# Altium PCB vp40_base_board.PcbDoc (part 2 of 5)
Units mil, origin at the board's own origin, x right, y up, seen from the top; angles counter-clockwise.
Board outline 8267.72 x 4330.71 mil, 4 copper layers (Top Layer, Internal Plane 1, Internal Plane 2, Bottom Layer), stack 30.635 mil thick; 531 components, 391 nets, 1969 pads, 1352 vias.
Unrouted connection lines stored in the file: 302.
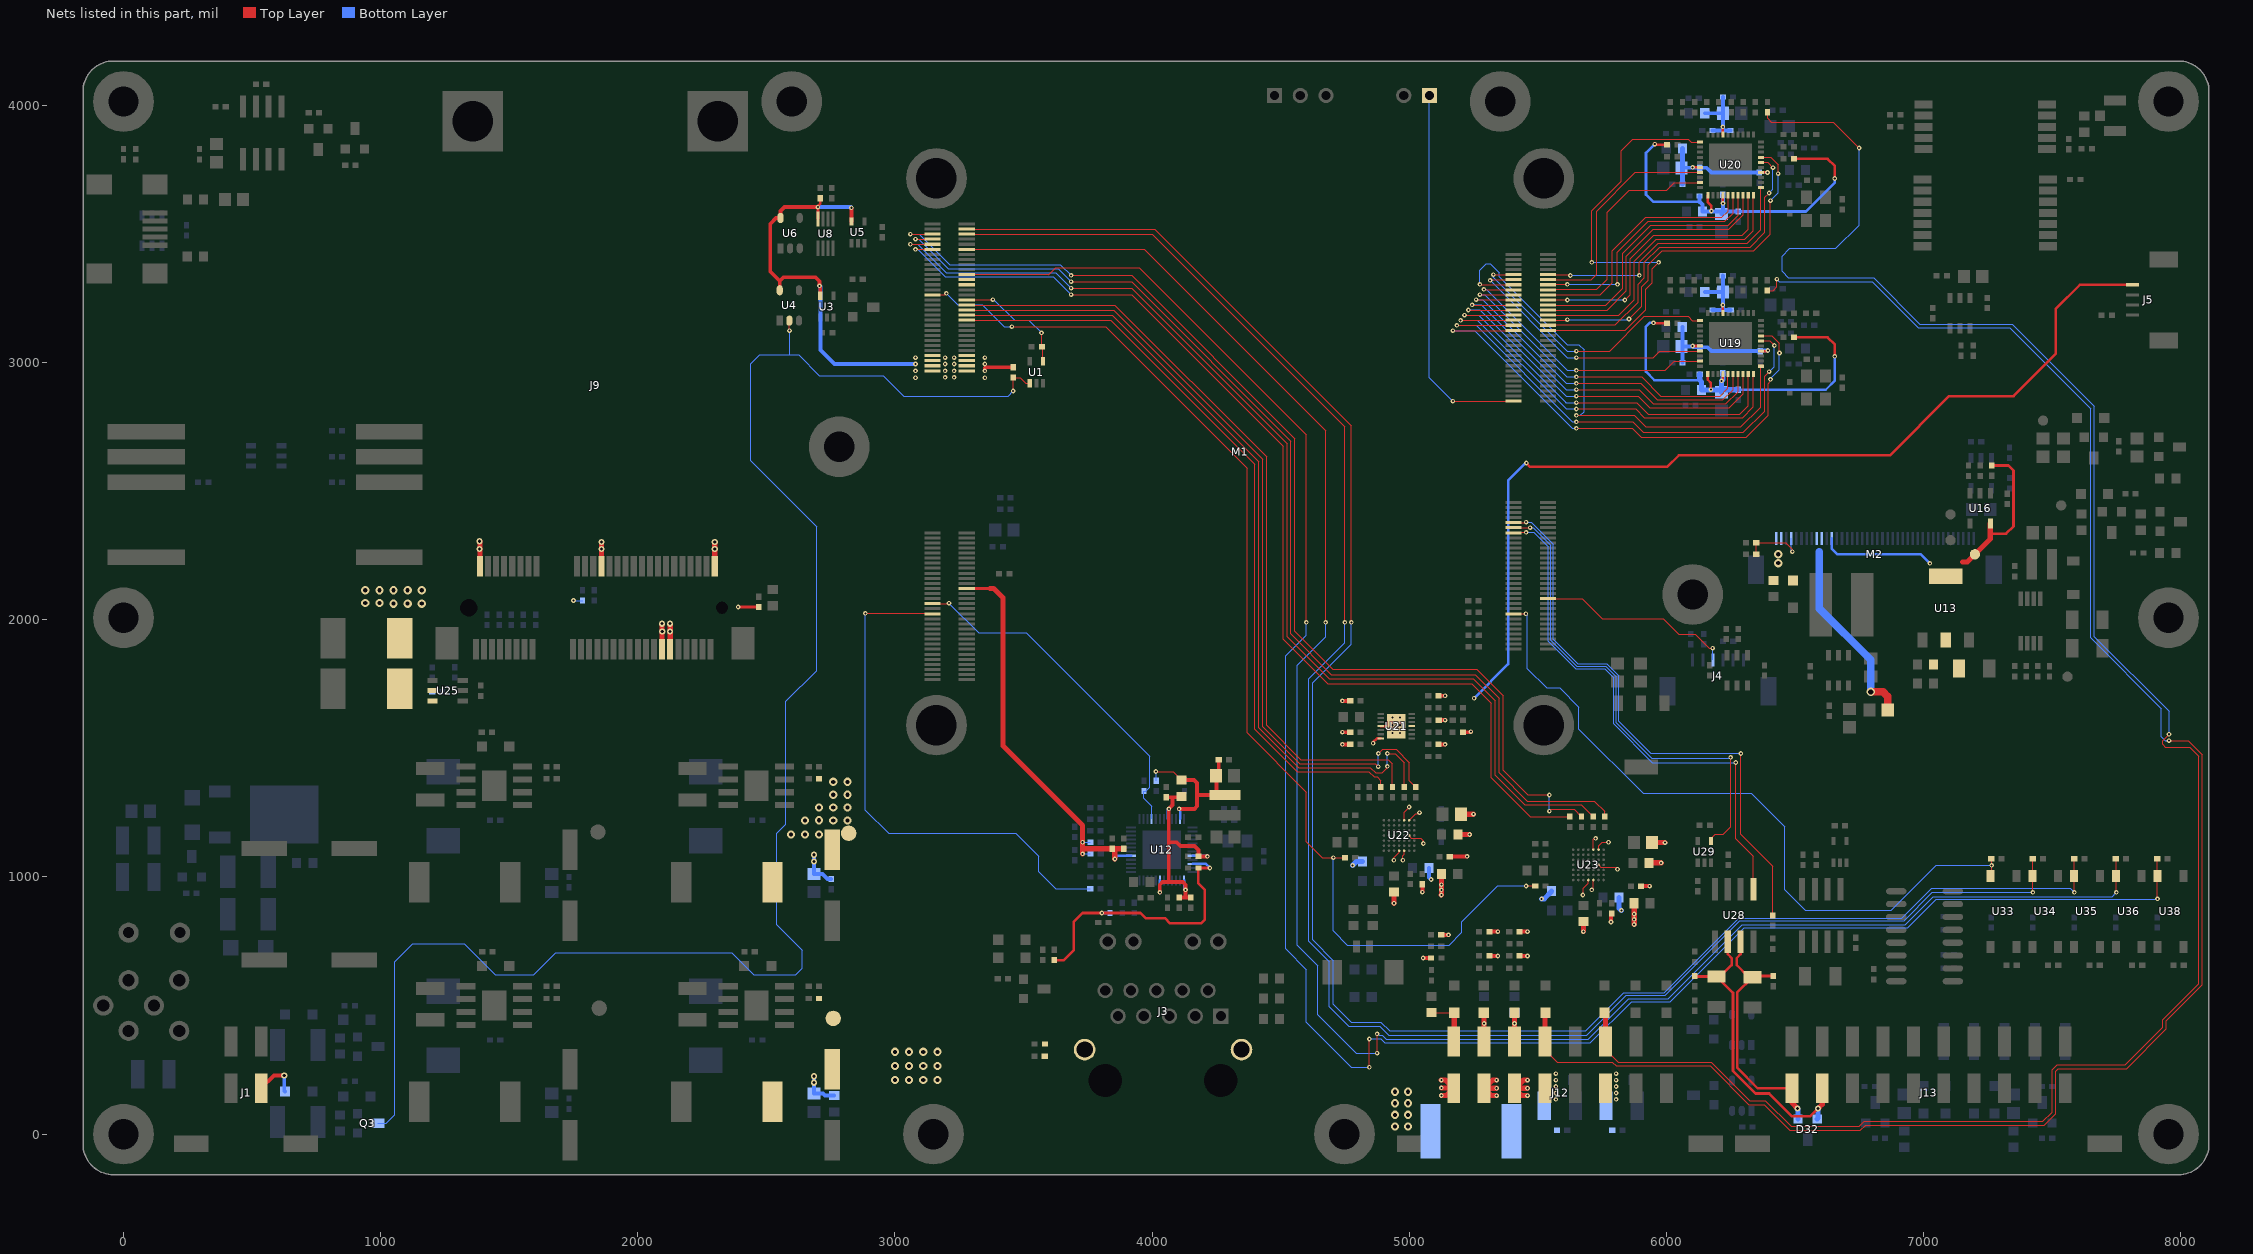
[diagram p4: the nets of this part, all layers, seen from the top]

## Part data
C1 C2 C3 C4 C6 C8 C9 C10 C11 C13 C14 C15 C16 C18 C19 C20 C21 C22 C23 C24 C26 C28 C29 C30 C31 C33 C34 C35 C36 C37 C38 C39 C40 C41 C42 C43 C44 C45 C46 C47 C48 C49 C50 C51 C52 C53 C54 C55 C56 C57 C58 C60 C73 C75 C76 C77 C78 C79 C80 C81 C82 C83 C84 C85 C86 C87 C88 C89 C90 C91 C92 C93 C94 C95 C96 C97 C98 C99 C100 C101 C102 C103 C104 C105 C106 C107 C108 C109 C110 C111 C112 C113 C114 C115 C116 C117 C118 C119 C120 C121 C122 C123 C124 C125 C126 C127 C128 C129 C130 C131 C132 C133 C134 C135 C136 C137 C138 C139 C140 C141 C142 C143 C144 C145 C146 C147 C148 C149 C150 C151 C152 C153 C154 C155 C156 C157 C158 C159 C160 C161 C162 C163 C164 C165 C166 C167 C168 C169 C202 C203 C204 C205 C206 C207 C208 C209 C210 C211 C213 C214 C216: library part Cap, "Capacitor"
C5 C7 C12 C17 C25 C27 C181 C182: library part "CAP WP"
C32 C170 C171 C172 C173 C174: library part CAP_Dup1
C59 C64 C65 C67 C69 C74: library part GRM155R71C104KA88D, "CAP, CERM, 0.1 μF, 16 V, +/- 10%, X7R, 0402"
C61 C62: library part C2012X5R1E106K125AB, "CAP, CERM, 10 μF, 25 V, +/- 10%, X5R, 0805"
C63 C71: library part GRM219R61A106KE44D, "CAP, CERM, 10 μF, 10 V, +/- 10%, X5R, 0805"
C66: library part GRM155R71H332KA01D, "CAP, CERM, 3300 pF, 50 V, +/- 10%, X7R, 0402"
C68 C72: library part GRM188R61H105KAALD, "CAP, CERM, 1 μF, 50 V, +/- 10%, X5R, 0603"
C70 C175 C176 C177 C178 C179 C180 C183 C184 C185 C186 C187 C188 C189 C190 C191 C192 C193 C199 C200 C201: library part "P_CAP NP"
C194 C195 C196 C197 C198: library part CAP
D1 D5 D6 D7 D8 D9 D10 D11 D12 D13 D14 D20 D35 D39 D42 D44 D46 D47 D48: library part "Diode 11DQ03", "Schottky Rectifier"
D2 D3 D4 D34 D37 D41: library part MMGZ5231BPTLL34
D15 D16: "Diode, Schottky, 30 V, 0.2 A, SOT-23"
D17: "Diode, Zener, 7.5 V, 200 mW, SOD-323F"
D18: library part MM3Z18VB, "Diode, Zener, 18 V, 200 mW, SOD-323F"
D19: "Diode, Schottky, 20 V, 1 A, SOD-123FL"
D21 D22 D24 D25 D26 D27 D28 D36 D38 D40 D43 D45: library part PESD
D31: library part LN01401_1
D32: library part PESD2CAN
F1: library part 2A_32VDC_0467-002
J1 J5: library part "Header 4", "Header, 4-Pin"
J2 J6: library part "Header 2", "Header, 2-Pin"
J4: library part "Header 6", "Header, 6-Pin"
J7: library part FOX_UH51543-JS7
J10: library part HRS_U_0.FL-R-SMT-10
J11: library part "Header 3", "Header, 3-Pin"
J12: "Header, 8-Pin, Dual row"
J13: "Header, 10-Pin, Dual row"
L1: library part BNX002-01
L2 L3 L4 L5: library part 4.7UH_CDH2D09BNP-4R7MC_0.7A_20%
L6 L8 L11 L12 L13 L14 L15 L16 L17 L18 L19 L20 L21 L22 L23 L24 L25 L26 L27 L28 L29 L30: library part Inductor, "Inductor"
L7 L9 L10: library part INDUCTOR, "IND PWR 4.7UH@1MHZ 1A 20% SMD"
L31: library part 2.2UH_LPS3015-222MLC_1.5A_20%~D
M2: library part LVDS-LCD7
Q1 Q8: library part AO3401L_SOT23-3_0
Q2 Q6: library part PNP, "PNP Bipolar Transistor"
Q3 Q5 Q10 Q11 Q12: library part MMBT3904_NL_SOT23-3
Q4 Q9 Q13 Q14: library part MOSFET-N, "N-Channel MOSFET"
Q7: library part NPN, "NPN Bipolar Transistor"
R1 R2 R3: library part RES1
R4 R5 R11 R23 R24 R25 R26 R27 R28 R29 R30 R31 R32 R33 R34 R35 R36 R37 R38 R39 R40 R41 R42 R43 R45 R46 R47 R48 R49 R50 R51 R52 R53 R54 R55 R56 R57 R77 R78 R79 R80 R81 R82 R83 R84 R85 R86 R87 R88 R89 R90 R91 R92 R93 R94 R95 R96 R97 R98 R99 R100 R101 R102 R103 R104 R105 R106 R107 R108 R109 R110 R111 R112 R113 R114 R115 R116 R117 R118 R119 R120 R121 R122 R123 R124 R125 R131 R132 R133 R149 R150 R151 R154 R155 R156 R159 R160 R161 R164 R165 R167 R168: library part CR16-1003FM
R6 R9 R147 R148 R152 R153 R157 R158 R162 R163 R166 R169: library part R
R7 R8 R10 R12 R13 R14 R15 R16 R17 R18 R19 R20 R21 R22: library part Res3, "Resistor"
R58 R59 R60 R61 R62 R63 R64 R65 R66 R67 R68 R69 R70 R71 R72 R73 R74 R75 R76 R126 R127 R128 R129 R130 R134 R135 R136 R137 R138 R139 R140 R141 R142 R143 R144 R145 R146: library part P_R
U2 U7 U9 U10: library part LM22670_0
U4 U6 U37 U39: library part 74LVC1G04GW_SOT353-5
U8: library part NC7SZ74-US8_0, "IC;NC7SZ74,D-TYPE FLIP-FLOP,US8"
U11 U13: library part LD1117AS18, "IC VREG LDO 1.8V 1A 10V SOT-223"
U12: library part AR8031_QFN48, "IC XCVR ETHERNET PHY 10/100/1000G-BIT 3.3V QFN48"
U14: library part TPS73633DBVT
U15: library part TPS61085DGKR, "18.5 V, 2 A, 650 KHz / 1.2 MHz Step-Up DC-DC Converter with Forced PWM Mode, 2.3 to 6 V, -40 to 85 degC, 8-pin SOP (DGK8), Green (RoHS & no Sb/Br)"
U16: "Single 30V High Output Current and Unlimited Capacitive Load Op Amp"
U17 U25 U26: library part TPS27081A
U21: library part MAX9814_TDFN14, "IC LIN AGC AMP 2.7-5.5V TDFN14"
U22 U23: library part WM8962_BGA_49P_CUST, "IC AUDIO CODEC 24BIT DAC 2 CH ADC 1.8V BGA49"
U24: library part MIC2526_8P, "IC LIN SW PWR ACTIVE HIGH DUAL 2.7V-5.5V 0.5A SOIC8"
U27: library part NEO-5M
U28: library part TJA1040T_SO_8P, "IC XCVR CAN HS 5V SO8"
U30: library part MAX3232
U32: library part MAX485
U33 U34 U35 U36 U38: library part Optoisolator1, "4-Pin Phototransistor Optocoupler"
Y1: library part XTAL_13Y, "XTAL 25MHZ -- -- SMT"
Y2 Y3: library part CRYSTAL_JXS63, "XTAL 28.63636MHZ 10PF RSN -- SMT"

## Free pads (board coordinates)
  round 236.22 hole 118.11: MT1(0,0) MT2(3149.61,0) MT3(4748.03,0) MT4(7952.76,0) MT5(7952.76,2007.87) MT6(6102.36,2098.43) MT7(2783.46,2673.23) MT8(0,2007.87) MT9(0,4015.75) MT10(2598.43,4015.75) MT11(5354.33,4015.75) MT12(7952.76,4015.75)
  round 52 on Plane2: ""(1130,635) ""(1130,675) ""(1170,635) ""(1170,675) ""(1210,635) ""(1210,675) ""(1250,635) ""(1250,675) ""(1290,635) ""(1290,675) ""(1649.61,885.83) ""(1681.1,885.83) ""(1779.53,944.88) ""(1799.21,763.78) ""(1799.21,803.15) ""(1799.21,842.96) ""(1799.21,881.89) ""(1838.58,763.78) ""(1838.58,803.15) ""(1838.58,842.52) ""(1838.58,881.89)
  round 56 on Plane2: ""(1421.26,458.66) ""(1421.26,500) ""(1421.26,540) ""(1465,460) ""(1465,500) ""(1465,540)
  round 48 on Plane2: ""(1470,708.66) ""(1515,365) ""(1574.8,655) ""(1724.41,575)
  round 60 smd paste-30: ""(1845,1175) ""(1850,490) ""(2760,450) ""(2820,1170)
  round 40 on Plane2: ""(2440,1315) ""(2440,1355) ""(2440,1395)
  round 40 smd paste-30: ""(7105,2310) ""(7105,2410) ""(7200,2255) ""(7465,2775) ""(7535.43,2445) ""(7560,1779.13)

## Via types
v1: diameter 18, hole 8, Top Layer to Bottom Layer, tented both sides, 481 vias
v2: diameter 18, hole 8, Top Layer to Bottom Layer, 376 vias
v3: diameter 32, hole 16, Top Layer to Bottom Layer, tented both sides, 202 vias
v4: diameter 24, hole 12, Top Layer to Bottom Layer, tented both sides, 182 vias
v5: diameter 24, hole 12, Top Layer to Bottom Layer, 65 vias
v6: diameter 32, hole 16, Top Layer to Bottom Layer, 34 vias
v7: diameter 32, hole 20, Top Layer to Bottom Layer, 7 vias
v8: diameter 32, hole 20, Top Layer to Bottom Layer, tented both sides, 3 vias
v9: diameter 35, hole 20, Top Layer to Bottom Layer, 2 vias

## Nets (pads, with @x,y where several pads share a name; then routed paths per layer and width w, separated by ;. In a path a pad name is that pad's centre, name@x,y a point inside that pad or via, vN(x,y) a via of type N, cw(c..) or ccw(c..) an arc to the next point about the centre after c; other vN are vias at no path point)
2V5-RGMII: C35.1 R48.2 R49.2 U12.10 | length 1108.7
  Top Layer w10: R48.2@3620,676.98 3656.98,676.98 3695,715 3695,825 3730,860 v1(3805,860) 3955,860 3975,840 4050,840 4070,820 4190,820 4205,835 4205,950 4180.13,974.87 C35.1@4180.13,1035 v1(4225,1035)
  Bottom Layer w10: v1(3805,860) R49.2@3836.3,860 ; U12.10@4157.48,1051.18 4208.82,1051.18 v1(4225,1035)
3V3-VIDEO1: C76.1 C86.1 C101.2 C102.2 L14.2 R79.2 R81.2 U19.1 U19.4 | length 1549.2
  Top Layer w10: v1@5951.46,3153.54 R79.2@6002.87,3153.54 ; U19.1@6160.98,2956.69 6160.98,2933.7 6173.24,2921.43 v1(6173.24,2895) ; v1(6215,2929.13) 6220.03,2934.17 U19.4@6220.03,2956.69 ; R81.2@6495.81,3098.43 6626.78,3098.43 6655,3070.21 v2(6655,3025)
  Bottom Layer w10: v1(5950,3155) 5935,3155 5920,3140 5920,2965 5953,2932 6129.39,2932 ; C101.2@6280,2894.87 6619.87,2894.87 6655,2930 v2(6655,3025)
  Bottom Layer w15: 6129.39,2932 6129.87,2932.48
  Bottom Layer w20: C102.2@6129.87,2955 6129.87,2932.48 6137.35,2925 L14.2@6137.35,2893.7 C86.1@6206.3,2893.7 ; C86.1@6215,2885 v1(6215,2929.13) 6220.03,2934.17 C76.1@6220.03,2960.19 ; C86.1@6224.87,2894.87 C101.2@6280,2894.87
3V3-VIDEO2: C106.1 C107.1 C131.2 C132.2 L18.2 R88.2 R90.2 U20.1 U20.4 | length 1517.3
  Top Layer w10: v1@5956.84,3848.16 R88.2@6002.99,3848.16 ; U20.1@6161.1,3651.31 6161.1,3623.9 6175,3610 v1(6175,3590) ; U20.4@6220.16,3651.31 6220.16,3620.16 6220,3620 v1(6220.47,3620) ; R90.2@6495.94,3793.04 6627.17,3793.04 6655,3765.21 v2(6655,3716.54)
  Top Layer w15: v1(5955,3850) v1@5956.84,3848.16
  Bottom Layer w10: v1(5955,3850) 5921,3816 5921,3654 5949.8,3625.2 6128.14,3625.2 ; C132.2@6279.69,3588.08 6543.08,3588.08 6655,3700 v2(6655,3716.54)
  Bottom Layer w15: 6128.14,3625.2 6129.56,3626.62 ; C131.2@6129.56,3648.2 6129.56,3626.62 ; C107.1@6214.69,3578.2 6220.47,3583.99 C107.1@6220.47,3588.2 ; C106.1@6219.69,3653.08 6220.47,3652.29 v1(6220.47,3620) C107.1@6220.47,3588.2 ; C132.2@6279.69,3588.08 6279.56,3588.2 C107.1@6220.47,3588.2 ; 6129.56,3626.62 6141.18,3615 L18.2@6141.18,3588.2 C107.1@6220.47,3588.2
12V-CAM: C25.1 C26.2 C29.2 F1.1 L5.2 pad.@2760,450 R20.2 | length 149.5
  Bottom Layer w15: v4(2685,225) 2685.04,224.96 C26.2@2685.04,157.48 2720,157.48 2727.87,149.61 C29.2@2763.78,149.61
  other v3: 3000,210 3055,210 3110,210 3165,210 3000,265 3055,265 3110,265 3165,265 3000,320 3055,320 3110,320 3165,320
  other v4: 2685,200
  other v6: 4945,30 4995,30 4945,75 4995,75 4945,120 4995,120 4945,165 4995,165
ACC: Q3.1 R4.2 U1.1 U4.2 | length 6348.7
  Top Layer w4.7: U4.2@2589.38,3163.58 2589.38,3125.62 v2(2590,3125) ; v2(3460,2890) R4.2@3460,2942.44 3486.76,2942.44 3508.77,2920.43 U1.1@3524.25,2920.43
  Bottom Layer w4.7: Q3.1@989.45,41.94 1021.94,41.94 1055,75 1055,670 1125,740 1325,740 1445,620 1595,620 1680,705 2365,705 2450,620 2615,620 2640,645 2640,715 2540,815 2540,1170 2575,1205 2575,1682.58 2695,1802.58 2695,2362.91 2440,2617.91 2440,2995 2475,3030 2590,3030 ; v2(2590,3125) 2590,3030 ; v2(3460,2890) 3440,2870 3035,2870 2955,2950 2705,2950 2625,3030 2590,3030
ACC-INPUT: D4.1 J1.4 | length 174.5
  Top Layer w15: J1.4@535.43,178.35 585.43,228.35 v4(625,228.35)
  Bottom Layer w15: v4(625,228.35) 625,168.31 D4.1@627.95,165.35
ACC-STATUS: M1.D29 R5.2 U1.4 | length 451.5
  Top Layer w4.7: M1.D29@3279.53,3244.1 v2@3380.73,3244.1 ; v2(3570,3116.34) 3571.68,3114.65 R5.2@3571.68,3062.16 ; U1.4@3575.45,3005.43 3575.45,3058.05 R5.2@3575.62,3058.22
  Bottom Layer w4.7: v2(3380.73,3245) 3385,3245 3465,3165 3521.34,3165 v2(3570,3116.34)
AGND1: C135.1 C136.2 C138.2 C139.2 C140.1 C144.1 C146.1 C147.1 C152.1 C153.1 C154.1 J5.4 J12.2 L24.2 R99.2 R100.2 R101.2 R102.2 R103.2 U21.4 U21.7 U21.11 U21.15 U22.B1 U22.B4 U22.C1 U22.C7 U22.D7 | length 4974.9
  Top Layer w3: U22.B4@5000,1161.42 5000,1160 5008.77,1151.23 5045,1151.23
  Top Layer w4.7: v1(4940,1065) 4940,1075.33 4960.63,1095.96 U22.D7@4960.63,1102.36 ; v1(4975,1065) 4975,1082.68 4980.32,1088 U22.C7@4980.32,1102.36 ; 4980.3,1230.98 4980.3,1249.02 ; U22.C1@4980.32,1220.48 4980.32,1230.96 ; 4980.32,1249.04 4980.32,1252.25 v1(5000,1271.93) ; U22.B1@5000,1220.48 5024.83,1245.3 5035.3,1245.3 v1(5040,1250) ; 5045,1151.23 5055,1141.23 v1(5055,1130)
  Top Layer w10: v1(4860,1520) 4860,1524.38 4875,1539.38 U21.7@4889.76,1539.38 ; U21.4@4889.76,1586.62 U21.15@4949.8,1586.62 ; v2(5455.56,2610) 5470.56,2595 6003.19,2595 6048.19,2640 6870,2640 7100.08,2870.08 7350.09,2870.08 7515,3034.99 7515,3210 7608.15,3303.15 J5.4@7813.39,3303.15
  Top Layer w15: v1(4740,1562.99) C135.1@4770.77,1562.99 ; v1(4740,1685) 4740.04,1685.04 C139.2@4771.02,1685.04 ; v1(4740.04,1515.75) C138.2@4771.02,1515.75 ; v1(5051.18,940.94) C153.1@5051.18,972 ; v1(5053.89,685) R102.2@5085.13,685 ; R101.2@5114.36,1515.75 5139.51,1515.75 v1(5139.76,1516) ; R99.2@5114.36,1704.72 v1(5140,1704.72) ; C136.2@5114.8,1610.24 5139.76,1610.24 v1(5140,1610) ; R103.2@5124.87,775 v1(5152.93,775) ; C152.1@5157.93,1078.74 5159.19,1080 v1(5225,1080) ; R100.2@5208.85,1562.99 5237.99,1562.99 v1(5240,1565)
  Top Layer w20: v1(4940.74,897.83) 4940.94,898.03 C154.1@4940.94,940.94 ; v1(5124.87,210) 5141.57,210 J12.2@5171.57,180 ; v1(5124.87,930) 5125,930.13 v1(5125,950) v1(5125,970) 5125,1010.83 L24.2@5125.98,1011.81 ; v1(5125,150) 5144.88,150 J12.2@5173.23,178.35 J12.2@5171.57,180 ; v1(5125,180) J12.2@5171.57,180 ; C144.1@5188.99,1165.36 v1(5235,1165.36) ; C140.1@5200.8,1244.1 v1(5250,1244.09)
  Bottom Layer w10: v2(5252.52,1695) 5385,1827.48 5385,2542.36 5452.64,2610 v2(5455.56,2610)
  Bottom Layer w15: C147.1@5076.5,1035 5076.5,998.5 v1(5085,990)
  Bottom Layer w20: v1(4780,1045) 4795,1060 C146.1@4818.5,1060
  other v1: 4935,1560 4965,1560 4935,1590 4965,1590 4935,1620 4965,1620
AGND2: C155.1 C159.1 C163.1 C164.1 C167.1 C168.1 C169.1 J12.4 J12.6 L28.2 R111.2 R112.2 R113.2 R114.2 U23.B1 U23.B4 U23.C1 U23.C7 U23.D7 | length 1169.4
  Top Layer w3: U23.B4@5736.22,1047.24 5745.72,1037.74 5781.58,1037.74
  Top Layer w4.7: v1(5675,930) 5677.16,932.16 5677.16,944.7 5677.17,956.73 5696.85,976.41 U23.D7@5696.85,988.18 ; v1(5710,950) 5716.34,956.34 5716.34,987.98 U23.C7@5716.54,988.18 ; v1@5715,950 v1@5716.34,951.34 ; U23.C1@5716.54,1106.3 5716.54,1116.82 5716.34,1117.02 5716.34,1131.93 5716.54,1132.13 5716.54,1146.41 5720.13,1150 v1(5725,1150) ; U23.B1@5736.22,1106.3 5736.22,1121.22 5749.96,1134.96 5754.88,1134.96 5754.92,1135 v1(5775,1135) ; 5781.58,1037.74 5802.26,1037.74 v1(5810,1030) v1@5810,1025.48
  Top Layer w15: R111.2@5311.65,692.91 v1(5345,692.91) ; R113.2@5311.65,787.4 v1(5345,787.4) ; R114.2@5429.32,787.4 v1(5460,787.4) ; R112.2@5431.41,695 R112.2@5429.32,692.91 v1(5460,692.91) ; v1(5785,825) 5785,855.43 C168.1@5787.4,857.83 ; C167.1@5902.02,964.57 v1(5935,964.57)
  Top Layer w20: v1(5340,149.61) 5320.08,149.61 J12.4@5291.34,178.35 J12.4@5293.43,178.35 ; v1(5340,178.35) J12.4@5293.43,178.35 ; v1(5340,210) 5325.08,210 J12.4@5293.43,178.35 ; v1(5460,149.61) 5438.19,149.61 J12.6@5409.45,178.35 J12.6@5413.35,178.35 ; v1(5460,178.35) J12.6@5413.35,178.35 ; v1(5460,210) 5445,210 J12.6@5413.35,178.35 ; v1(5677.16,787.4) C169.1@5677.17,826.77 ; L28.2@5874.02,897.64 5875,896.65 v1(5875,815) ; C159.1@5933.07,1055.12 5979.88,1055.12 v1(5980,1055) ; C155.1@5944.88,1133.86 v1(5995,1133.86)
  Bottom Layer w20: v1(5515,915) 5525,915 5553.5,943.5 C163.1@5553.5,945 ; C164.1@5816.5,920 5816.5,878.5 v1(5825,870)
  other v1: 5875,835 5875,855.83
AUD3-RXD: M1.D27 R109.2 | length 3096.9
  Top Layer w4.7: M1.D27@3279.53,3224.41 3855.59,3224.41 4445,2635 4445,1590 4578.31,1456.69 4918.31,1456.69 4935,1440 R109.2@4935,1349.87
AUD3-TXC: M1.D21 R106.2 | length 2980.5
  Top Layer w4.7: M1.D21@3279.53,3165.36 3839.64,3165.36 4400,2605 4400,1575 4565,1410 4843.12,1410 4863.12,1390 4875,1390 4890,1375 R106.2@4890,1349.87
AUD3-TXD: M1.D23 R108.2 | length 3217
  Top Layer w4.7: M1.D23@3279.53,3185.04 3844.96,3185.04 4415,2615 4415,1580 4570,1425 4849.25,1425 4869.25,1405 4895,1405 4915,1425 v2(4915,1430) ; v2(4915,1480) 4945,1480 4980,1445 R108.2@4980,1349.87
  Bottom Layer w4.7: v2(4915,1430) v2(4915,1480)
AUD3-TXFS: M1.D25 R107.2 | length 3268.4
  Top Layer w4.7: M1.D25@3279.53,3204.73 3850.27,3204.73 4430,2625 4430,1585 4575,1440 4868.7,1440 v2(4879.57,1429.13) ; v2(4880,1480) 4896.35,1496.35 4948.65,1496.35 5000.17,1444.83 5000.17,1374.71 R107.2@5025,1349.87
  Bottom Layer w4.7: v2(4879.57,1429.13) 4879.57,1489.57 4880,1489.13 v2(4880,1480)
AUD4-RXD: M1.D56 R118.2 | length 4286.6
  Top Layer w4.7: v2(3060,3500) M1.D56@3145.67,3500 ; v2(3685,3340) 3920,3340 4555,2705 4555,1955 4702.91,1807.09 5262.91,1807.09 5365,1705 5365,1415 5461.1,1318.9 v2(5545,1318.9) ; v2(5545,1255.91) 5552.87,1263.78 5641.09,1263.78 R118.2@5670,1234.87
  Bottom Layer w4.7: v2(3060,3500) 3095,3500 3213.11,3381.89 3643.11,3381.89 v2(3685,3340) ; v2(5545,1255.91) v2(5545,1318.9)
AUD4-TXC: M1.D50 R115.2 | length 4133.7
  Top Layer w4.7: v2(3080,3440.95) M1.D50@3145.67,3440.95 ; v2(3685,3265) 3920,3265 4510,2675 4510,1925 4683.03,1751.97 5243.03,1751.97 5320,1675 5320,1385 5470.13,1234.87 R115.2@5625,1234.87
  Bottom Layer w4.7: v2(3080,3440.95) 3089.05,3440.95 3195,3335 3615,3335 v2(3685,3265)
AUD4-TXD: M1.D52 R117.2 | length 4271.8
  Top Layer w4.7: v2(3060,3460.63) M1.D52@3145.67,3460.63 ; v2(3685,3290) 3920,3290 4525,2685 4525,1935 4690,1770 5250,1770 5335,1685 5335,1395 5450,1280 5669.87,1280 R117.2@5715,1234.87
  Bottom Layer w4.7: v2(3060,3460.63) 3089.37,3460.63 3200,3350 3625,3350 v2(3685,3290)
AUD4-TXFS: M1.D54 R116.2 | length 4296.7
  Top Layer w4.7: v2(3080,3480.32) M1.D54@3145.67,3480.32 ; v2(3685,3315) 3920,3315 4540,2695 4540,1945 4697.6,1787.4 5257.6,1787.4 5350,1695 5350,1405 5460,1295 5719.91,1295 5760,1254.91 R116.2@5760,1234.87
  Bottom Layer w4.7: v2(3080,3480.32) 3080.32,3480 3092.76,3480 3207.76,3365 3635,3365 v2(3685,3315)
AUD-AUX-OUT1: D28.2 J12.3 L25.2 | length 154.6
  Top Layer w20: D28.2@5290,471.85 5291.34,470.51 v2(5291.34,430) J12.3@5291.34,360.24
  Bottom Layer w4.7: v2(5291.34,430) L25.2@5291.34,472.44
AUD-AUX-OUT2: D27.2 J12.5 L26.2 | length 154.3
  Top Layer w20: J12.5@5409.45,360.24 5409.45,471.3 D27.2@5410,471.85
  Bottom Layer w4.7: v2(5409.45,430) L26.2@5409.45,472.44
AUD-MCLK: M1.D32 R110.2 R119.2 | length 4444
  Top Layer w4.7: M1.D32@3145.67,3263.78 3193.51,3263.78 v2(3199.73,3270) ; v2(3455,3140) 3820,3140 4370,2590 4370,1560 4600,1330 4600,1137.43 4662.43,1075 v2(4705,1075) R110.2@4750.13,1075 ; v2(5455,965) R119.2@5490.13,965
  Bottom Layer w4.7: v2(3199.73,3270) 3244.73,3225 3339.87,3225 3424.87,3140 v2(3455,3140) ; v2(4705,1075) 4705,790 4760,735 5155,735 5205,785 5205,825 5345,965 v2(5455,965)
AUD-OUT: D24.2 J12.1 L20.2 | length 201
  Top Layer w4.7: L20.2@5086.61,472.44 5174.41,472.44 D24.2@5175,471.85
  Top Layer w20: J12.1@5173.23,360.24 5175,362.01 D24.2@5175,471.85
AVDD: C60.1 M2.29 pad.@7200,2255 R62.1 R67.1 U13.2 U13.4 U16.5 | length 1061.6
  Top Layer w10: 7259.84,2335 7321.14,2335 7350,2363.86 7350,2580 7329.87,2600.13 R67.1@7265,2600.13
  Top Layer w20: 7151.14,2225 7170,2225 7259.84,2314.84 7259.84,2335 U16.5@7259.84,2374.02
  Bottom Layer w10: M2.29@6643.7,2316.54 6643.7,2276.14 6664.84,2255 6990,2255 v1(7025,2220)
AVDD-1V8-VIDEO1: C82.1 C83.1 C96.2 C98.2 L13.2 U19.27 | length 306.4
  Top Layer w10: U19.27@6220.03,3192.91 v1(6220.03,3224.41)
  Bottom Layer w15: L13.2@6149.17,3275.59 C83.1@6220.03,3275.59 ; C98.2@6179.87,3205 6220,3205 C96.2@6250.13,3205 ; C82.1@6219.59,3338.58 6220.03,3338.14 C83.1@6220.03,3275.59 ; 6220.03,3205.03 v1(6220.03,3224.41) C83.1@6220.03,3275.59
AVDD-1V8-VIDEO2: C112.1 C113.1 C126.2 C128.2 L17.2 U20.27 | length 301.1
  Top Layer w10: v1(6220,3917.32) 6220.16,3917.17 U20.27@6220.16,3887.53
  Bottom Layer w15: L17.2@6149.29,3970.2 6219.84,3970.2 C113.1@6220,3970.05 ; C128.2@6179.56,3903.2 6220,3903.2 ; C112.1@6219.72,4033.2 6220.16,4032.76 C113.1@6220.16,3970.2 C113.1@6220,3970.05 ; C126.2@6249.81,3903.2 6220,3903.2 ; 6220,3903.2 v1(6220,3917.32) C113.1@6220,3970.05
BL-LED+: C72.1 D20.2 M2.39 M2.40
  other v3: 6435,2220.47 6435,2255
BL-LED-: M2.31 M2.32 R74.2 | length 753
  Top Layer w30: v8(6795,1720) 6842.52,1720 6860.87,1701.65 R74.2@6860.87,1650
  Bottom Layer w30: 6595,2265 6595,2044.09 6795,1844.09 v8(6795,1720)
BM-SEL: J2.1 M1.B2 | length 1462.3
  Top Layer w4.7: v2(5170,2850.39) M1.B2@5405.51,2850.39
  Bottom Layer w4.7: J2.1@5078.74,4039.37 5078.74,2941.65 v2(5170,2850.39)
BUTTON1: M1.A16 R150.2 U33.4 | length 2793.9
  Top Layer w4.7: M1.A16@5405.51,2023.62 v2(5453.94,2023.62) ; U33.4@7261.02,1003.94 7265,1007.91 v2(7265,1045) 7265,1069.45 R150.2@7263.59,1070.86
  Bottom Layer w4.7: v2(5453.94,2023.62) 5460,2017.56 5460,1810 5535,1735 5585,1735 5660,1660 5660,1575 5910,1325 6330,1325 6460,1195 6460,950 6540,870 6875,870 7050,1045 v2(7265,1045)
BUTTON2: M1.D55 R155.2 U34.4 | length 7269.2
  Top Layer w4.7: M1.D55@3279.53,3500 4000.63,3500 4750,2750.63 v2(4750,1990) ; R155.2@7425.01,1070.87 7425.2,1070.68 v2(7425.2,940)
  Bottom Layer w4.7: v2(4750,1990) 4750,1910 4610,1770 4610,750 4690,670 4690,495 4765,420 4885,420 4920,385 5690,385 5845,540 5995,540 6285,830 6925,830 7035,940 v2(7425.2,940)
BUTTON3: M1.D57 R159.2 U35.4 | length 7449.9
  Top Layer w4.7: M1.D57@3279.53,3519.69 4010.31,3519.69 4775,2755 v2(4775,1990) ; R159.2@7586.43,1070.87 7585.83,1070.27 U35.4@7585.83,1003.94 7586.61,1003.15 v2(7586.61,940)
  Bottom Layer w4.7: v2(4775,1990) 4775,1905 4625,1755 4625,755 4705,675 4705,505 4775,435 4890.12,435 4923.54,401.57 5686.57,401.57 5835,550 5990.98,550 6280.98,840 6915,840 7031.35,956.35 7570.26,956.35 v2(7586.61,940)
BUTTON4: M1.D49 R164.2 U36.4 | length 7659.9
  Top Layer w4.7: M1.D49@3279.53,3440.95 3969.05,3440.95 4675,2735 v2(4675,1990) ; v2(4875,315) v2(4875,390) ; R164.2@7747.84,1070.87 7750,1068.71 v2(7750,940)
  Bottom Layer w4.7: v2(4675,1990) 4675,1934.09 4565,1824.09 4565,735 4645,655 4645,465 4795,315 v2(4875,315) ; v2(4875,390) 4875,393.5 4883.5,385 4895,385 4910.12,369.88 5696.81,369.88 5853.74,526.81 6006.81,526.81 6295,815 6930,815 7038.65,923.65 7733.65,923.65 v2(7750,940)
BUTTON5: M1.D39 R167.2 U38.4 | length 7839.2
  Top Layer w4.7: M1.D39@3279.53,3342.52 3597.52,3342.52 3625,3370 3950,3370 4600,2720 v2(4600,1990) ; v2(4845,260) v2(4845,370) ; R167.2@7909.26,1070.87 7910,1070.13 v2(7910,915)
  Bottom Layer w4.7: v2(4600,1990) 4600,1940 4520,1860 4520,720 4600,640 4600,435 4775,260 v2(4845,260) ; v2(4845,370) 4890,370 4905,355 5705,355 5865,515 6014.56,515 6302.71,803.15 6938.15,803.15 7048.95,913.95 7908.95,913.95 v2(7910,915)
BUTTON6: M1.D37
BUTTON7: M1.D35
CABCEN0: M2.37 R72.2 R73.2 | length 258.6
  Top Layer w3.82: R72.2@6349.87,2255 R73.2@6349.87,2300 6465,2300 6490,2275 v1(6490,2265)
  Bottom Layer w3.82: M2.37@6486.22,2316.54 6486.22,2268.78 v1(6490,2265)
CAM1: D21.2 J12.7 R78.2 | length 7155.9
  Top Layer w4.7: J12.7@5527.56,360.24 5527.56,327.44 5574.8,280.2 5789.8,280.2 5805,265 6170,265 6320,115 6380,115 6480,15 6755,15 6775,35 7470,35 7515,80 7515,245 7525,255 7790,255 7945,410 7945,440 8085,580 8085,1475 8030,1530 v2(7955,1530) ; R78.2@6392.57,3280.8 6415.8,3280.8 6430,3295 v2(6430,3325)
  Top Layer w20: J12.7@5527.56,360.24 5527.56,469.41 D21.2@5530,471.85
  Bottom Layer w4.7: v2(6430,3325) 6440,3315 6800,3315 6980,3135 7335,3135 7650,2820 7650,1930 7925,1655 7925,1545 7940,1530 v2(7955,1530)
CAM1-PWR: C211.1 C213.1 C214.1 C216.1 D47.2 D48.2 F1.2 J12.8 J12.12
  other v2: 5570,135 5805,135 5570,160 5805,160 5570,185 5805,185 5570,210 5805,210 5570,235 5805,235
CAM2: D22.2 J12.11 R86.2 | length 8089.5
  Top Layer w4.7: D22.2@5760,471.85 5760,333.77 5813.57,280.2 6174.8,280.2 6325,130 6385,130 6485,30 6750,30 6770,50 7464.06,50 7500,85.94 7500,250 7520,270 7785,270 7930,415 7930,445 8070,585 8070,1470 8035,1505 7940.3,1505 7930,1515.3 7930,1530 v2(7955,1555) ; R86.2@6393.39,3973.95 6393.39,3950.49 6408.87,3935 6650,3935 v2(6750,3835)
  Top Layer w20: D22.2@5760,471.85 5763.78,468.07 J12.11@5763.78,360.24
  Bottom Layer w4.7: v2(6750,3835) 6750,3535.32 6659.68,3445 6480,3445 6450,3415 6450,3355 6475,3330 6805.83,3330 6985.83,3150 7345,3150 7665,2830 7665,1935 7955,1645 v2(7955,1555)
CAN-RX: M1.A50 U29.4 | length 1911
  Top Layer w4.7: M1.A50@5405.51,2358.27 5469.89,2358.27 v2(5470.13,2358.5) ; U29.4@6173.24,1140.12 6173.24,1147.85 6190.75,1165.36 6220.36,1165.36 6250,1195 v2(6250,1465)
  Bottom Layer w4.7: v2(5470.13,2358.5) 5481.5,2358.5 5550.6,2289.4 5550.6,1921.36 5651.96,1820 5763.72,1820 5805,1778.72 5805,1600 5942.46,1462.54 6247.54,1462.54 v2(6250,1465)
CAN-STBY: M1.A52 R145.1 | length 2258.7
  Top Layer w4.7: M1.A52@5405.51,2377.95 5452.95,2377.95 v2(5455,2380) ; v2(6290,1480) 6290,1165.71 6413.39,1042.32 R145.1@6413.39,850.83
  Bottom Layer w4.7: v2(5455,2380) 5475,2380 5560.3,2294.7 5560.3,1925.38 5655.68,1830 5767.44,1830 5815,1782.44 5815,1605 5938.65,1481.35 6288.65,1481.35 v2(6290,1480)
CAN-TX: M1.A48 U28.1 | length 2076.8
  Top Layer w4.7: M1.A48@5405.51,2338.58 5406.93,2340 v2(5455,2340) ; v2(6270,1445) 6270,1148.78 6338.78,1080 U28.1@6338.78,952.76
  Bottom Layer w4.7: v2(5455,2340) 5485,2340 5540.9,2284.1 5540.9,1917.35 5648.25,1810 5760,1810 5795,1775 5795,1595 5945,1445 v2(6270,1445)
CAN_N: C192.1 D32.2 J13.4 R144.2 U28.6 | length 1197.1
  Top Layer w10: C192.1@6110,615.13 6112.02,613.11 R144.2@6195,613.11 ; U28.6@6238.78,748.03 6238.78,699.72 6253.78,684.72 6253.78,657.48 6214.41,618.11 6200,618.11 R144.2@6195,613.11 ; v5(6590,100) 6560,70 6487.5,70 6399.54,157.96 6347.04,157.96 6259.09,245.91 6259.09,549.02 R144.2@6195,613.11
  Top Layer w20: v5(6590,100) 6606.3,116.3 J13.4@6606.3,178.35
  Bottom Layer w20: D32.2@6586.81,59.06 6590,62.24 v5(6590,100)
CAN_P: C188.2 D32.1 J13.2 R142.1 U28.7 | length 1004.7
  Top Layer w10: U28.7@6288.78,748.03 6288.78,699.72 6273.78,684.72 6273.78,657.48 6316.26,615 6330,615 R142.1@6335,610 6275,550 6275,258.28 6354.94,178.35 J13.2@6488.19,178.35 ; R142.1@6339.87,614.87 C188.2@6415,614.87
  Top Layer w20: J13.2@6488.19,178.35 6488.19,121.81 v5(6510,100)
  Bottom Layer w20: v5(6510,100) 6511.81,98.19 D32.1@6511.81,59.06
CAP-TCH-INT: J4.4 M1.A21 | length 766.8
  Top Layer w4.7: M1.A21@5539.37,2082.68 5672.16,2082.68 5749.84,2005 5987.69,2005 6047.8,1944.88 6112.44,1944.88 6167.32,1890 v2(6180,1890)
  Bottom Layer w4.7: v2(6180,1890) 6180,1845.2 J4.4@6181.1,1844.09
CELL-3V3: C175.1 C181.1 C182.1 J9.2 J9.24 J9.39 J9.41 J9.52 R131.1 R132.2 U25.2 U25.3 | length 599
  Top Layer w10: v2(2390,2050) 2390.13,2049.87 R131.1@2470,2049.87
  Top Layer w20: v5(1385,2305.83) 1385.83,2305 J9.2@1385.83,2208.66 ; J9.24@1858.27,2208.66 v5(1858.27,2302.28) ; J9.39@2094.49,1885.83 v5(2094.49,1985) ; v5(2125,1985) 2125.98,1984.02 J9.41@2125.98,1885.83 ; J9.52@2299.21,2208.66 v5(2299.21,2302.72)
  Bottom Layer w4.7: v2(1750,2075) 1784.87,2075 R132.2@1785,2075.13
  other v5: 2095,1955 2125,1955 1385,2275 1858.27,2275 2299.21,2275
  other v6: 1050,2062.99 1105,2062.99 1160,2062.99 940,2065 995,2065 940,2115 995,2115 1050,2115 1105,2115 1160,2115
CPU-3V3: C11.2 C12.1 C13.2 L2.2 M1.D1 M1.D2 M1.D3 M1.D4 M1.D5 M1.D6 M1.D7 M1.D8 pad.@2820,1170 R4.1 R8.2 R14.1 U3.5 U4.5 U5.5 U6.5 U8.8 | length 1894.5
  Top Layer w10: U8.8@2700.79,3559.06 v1@2700.79,3605 ; v1@2700.79,3610.24 2710,3619.45 R14.1@2710,3639.87
  Top Layer w15: U4.5@2551.98,3281.69 2551.98,3317.53 ; v1(2700,3605) 2570.12,3605 2555.12,3590 U6.5@2555.12,3562.99 2537.99,3562.99 2515,3540 2515,3354.5 2551.98,3317.53 ; U3.5@2709.46,3260.39 2709.46,3296.5 v1(2706.86,3299.09) 2706.86,3316.69 2691.14,3332.41 2566.86,3332.41 2551.98,3317.53 ; U5.5@2830.71,3549.57 v1(2830.71,3602.74) ; 3350,2980 3352.44,2982.44 R4.1@3460,2982.44
  Bottom Layer w15: v4(2685.04,1086.61) C11.2@2685.04,1011.81 2718.19,1011.81 2737.68,992.32 C13.2@2751.97,992.32 ; v1(2700,3605) 2828.45,3605 v1(2830.71,3602.74) ; v1(2706.86,3299.09) 2710,3295.95 2710,3050 2765,2995 v1(3080,2995)
  other v1: 3080,2941.41 3350,2941.41 3195,2942.85 3230,2942.85 3080,2968.5 3195,2968.5 3230,2968.5 3350,2968.5 3195,2995 3230,2995 3350,2995 3080,3020 3195,3020 3230,3020 3350,3020
  other v3: 2704.72,1165 2596.29,1165.36 2650,1165.36 2650,1220 2760,1220 2815,1220 2705,1220.48 2705,1270 2760,1270 2815,1270 2760,1320 2815,1320 2760,1370 2815,1370
  other v4: 2685,1060
CSI0-DAT12: M1.B30 U19.17 | length 2051.1
  Top Layer w4.7: v1(5170,3125) 5404.53,3125 M1.B30@5405.51,3125.98 ; v1(5650.08,2745) 5867.02,2745 5902.02,2710 6310,2710 6395.35,2795.35 6395.35,2918.02 6405,2927.68 v1(6405,2935) ; U19.17@6367.67,3104.33 6410.67,3104.33 6440,3075 v1(6440,3037.99)
  Bottom Layer w4.7: v1(5170,3125) 5255,3125 5635,2745 v1(5650.08,2745) ; v1(6405,2935) 6405,2937 6440,2972 v1(6440,3037.99)
CSI0-DAT13: M1.B32 U19.16 | length 1954.2
  Top Layer w4.7: v1(5185,3145) 5185.67,3145.67 M1.B32@5405.51,3145.67 ; v1(5650,2770) 5870,2770 5910,2730 6300,2730 6381.89,2811.89 6381.89,2946.89 v1(6400,2965) ; U19.16@6367.67,3084.65 6402.68,3084.65 6402.68,3084.44 6420,3067.12 v1(6420,3066.93)
  Bottom Layer w4.7: v1(5185,3145) 5260,3145 5635,2770 v1(5650,2770) ; v1(6400,2965) 6420,2985 v1(6420,3066.93)
CSI0-DAT14: M1.B34 U19.10 | length 1656.9
  Top Layer w4.7: v1(5200,3165) 5196.81,3165 v1@5197.17,3165.35 ; v1@5200,3168.19 v1@5197.17,3165.35 ; M1.B34@5405.51,3165.35 v1@5197.17,3165.35 ; v1(5650.08,2820) 5880.2,2820 5913.85,2786.35 6296.35,2786.35 6338.14,2828.14 U19.10@6338.14,2956.69
  Bottom Layer w4.7: v1(5200,3165) 5265,3165 5610,2820 v1(5650.08,2820)
CSI0-DAT15: M1.B36 U19.9 | length 1590.6
  Top Layer w4.7: v1(5215.04,3185) M1.B36@5405.51,3185.04 M1.B36@5405.51,3185.04 ; v1(5650,2845) 5885,2845 5929.65,2800.35 6285.35,2800.35 6318.46,2833.46 U19.9@6318.46,2956.69
  Bottom Layer w4.7: v1(5215.04,3185) 5270,3185 5609.31,2845.69 5609.31,2845 v1(5650,2845)
CSI0-DAT16: M1.B38 U19.8 | length 1502
  Top Layer w4.7: v1(5230,3205) 5230.28,3204.72 M1.B38@5405.51,3204.72 ; v1(5650,2870.08) 5650.08,2870 5890,2870 5935,2825 6245,2825 6298.77,2878.77 U19.8@6298.77,2956.69
  Bottom Layer w4.7: v1(5230,3205) 5275,3205 5609.92,2870.08 v1(5650,2870.08)
CSI0-DAT17: M1.B40 U19.7 | length 1452
  Top Layer w4.7: v1(5245,3225) 5241.18,3225 5240.59,3224.41 M1.B40@5405.51,3224.41 ; v1(5650,2895) 5895,2895 5950,2840 6231.65,2840 6279.09,2887.43 U19.7@6279.09,2956.69
  Bottom Layer w4.7: v1(5245,3225) 5280.13,3225 5610.13,2895 v1(5650,2895)
CSI0-DAT18: M1.B42 U19.6 | length 1374.2
  Top Layer w4.7: v1(5260,3245) M1.B42@5394.61,3245 ; v1(5650,2920) 5900.09,2920 5965.09,2855 6220,2855 6259.4,2894.4 U19.6@6259.4,2956.69
  Bottom Layer w4.7: v1(5260,3245) 5285.13,3245 5610.13,2920 v1(5650,2920)
CSI0-DAT19: M1.B44 U19.5 | length 1316.8
  Top Layer w4.7: v1(5275,3265) M1.B44@5394.29,3265 ; v1(5650,2945) 5903.43,2945 5978.35,2870.08 6210.08,2870.08 6239.72,2899.72 U19.5@6239.72,2956.69
  Bottom Layer w4.7: v1(5275,3265) 5293.62,3265 5613.62,2945 v1(5650,2945)
CSI0-HSYNCH: M1.B46 U19.39 | length 1102.9
  Top Layer w4.7: v1(5290,3285) 5291.54,3283.46 M1.B46@5405.51,3283.46 ; v1(5650,2970) 5995,2970 6030.91,3005.91 U19.39@6131.45,3005.91
  Bottom Layer w4.7: v1(5290,3285) 5300,3285 5615,2970 v1(5650,2970)
CSI0-PIXCLK: M1.B48 U19.11 | length 1952.8
  Top Layer w4.7: v1(5275,3305) 5276.85,3303.15 M1.B48@5405.51,3303.15 ; v1(5650.08,2795) 5875,2795 5920,2750 6290,2750 6367.67,2827.67 U19.11@6367.67,2986.22
  Bottom Layer w4.7: v1(5275,3305) 5275,3360 5300,3385 5315,3385 5350,3350 5350,3335 5615,3070 5660,3070 5680,3050 5680,2809.13 5665.87,2795 v1(5650.08,2795)
CSI0-RST-B: M1.B52 U19.31 | length 1073.8
  Top Layer w4.7: v1(5327.52,3342.52) M1.B52@5405.51,3342.52 ; v1(5650,3045) 5780,3045 5915,3180 6085,3180 6101.61,3163.39 U19.31@6131.45,3163.39
  Bottom Layer w4.7: v1(5327.52,3342.52) 5327.52,3332.48 5615,3045 v1(5650,3045)
CSI0-VSYNCH: M1.B50 U19.37 | length 1054.2
  Top Layer w4.7: v1(5315,3320) 5317.83,3322.83 M1.B50@5405.51,3322.83 ; v1(5650,3020) 5949.72,3020 5975,3045.28 U19.37@6131.45,3045.28
  Bottom Layer w4.7: 5326.28,3320 v1(5315,3320) 5615,3020 v1(5650,3020)
CSI1-DAT12: M1.B33 U20.17 | length 1447.6
  Top Layer w4.7: M1.B33@5539.37,3165.35 5612.83,3165.35 v1(5615,3167.52) ; v1(5855,3170) 5905,3220 5905,3295 5930,3320 5930,3380.31 5984.69,3435 6340,3435 6405,3500 v1(6405,3630) ; U20.17@6367.8,3798.94 6405.31,3798.94 6435,3769.26 v1(6435,3735)
  Bottom Layer w4.7: v1@5615,3170 v1(5615,3167.52) 5852.52,3167.52 v1(5855,3170) ; v1(6405,3630) 6404.69,3630 6435,3660.31 v1(6435,3735)
CSI1-DAT13: M1.B31 U20.16 | length 1389.9
  Top Layer w4.7: M1.B31@5539.37,3145.67 5540.74,3147.04 5802.04,3147.04 5890,3235 5890,3305 5915,3330 5915,3390 5975,3450 6326.14,3450 6383.44,3507.3 6383.44,3643.44 v1(6400,3660) ; U20.16@6367.8,3779.26 6394.3,3779.26 v1(6414.69,3758.87)
  Bottom Layer w4.7: v1(6400,3660) 6414.69,3674.69 v1(6414.69,3758.87)
CSI1-DAT14: M1.B35 U20.10 | length 1160.6
  Top Layer w4.7: M1.B35@5539.37,3185.04 M1.B35@5539.37,3185.04 5815,3185 5875,3245 5875,3395 5960,3480 6304.68,3480 6338.27,3513.58 U20.10@6338.27,3651.31
CSI1-DAT15: M1.B41 U20.9 | length 1108.2
  Top Layer w4.7: M1.B41@5539.37,3244.09 v1(5615,3244.09) ; v1(5838.94,3244.1) 5840,3244.1 5860,3264.1 5860,3405 5951.06,3496.06 6296.06,3496.06 6318.58,3518.58 U20.9@6318.58,3651.31
  Bottom Layer w4.7: v1(5615,3244.09) v1(5838.94,3244.1)
CSI1-DAT16: M1.B37 U20.8 | length 1067.6
  Top Layer w4.7: M1.B37@5539.37,3204.72 5769.72,3204.72 5845,3280 5845,3415 5949.69,3519.69 6242.48,3519.69 6298.9,3576.1 U20.8@6298.9,3651.31
CSI1-DAT17: M1.B39 U20.7 | length 1041.2
  Top Layer w4.7: M1.B39@5539.37,3224.41 5612.49,3224.41 5612.84,3224.06 5764.06,3224.06 5830,3290 5830,3425 5940,3535 6240,3535 6279.21,3574.21 U20.7@6279.21,3651.31
CSI1-DAT18: M1.B47 U20.6 | length 978.1
  Top Layer w4.7: M1.B47@5539.37,3303.15 5541.22,3305 v1(5615,3305) ; v1(5810,3305) 5810,3430 5930,3550 6227.36,3550 6259.53,3582.17 U20.6@6259.53,3651.31
  Bottom Layer w4.7: v1(5615,3305) v1(5810,3305)
CSI1-DAT19: M1.B43 U20.5 | length 970.5
  Top Layer w4.7: M1.B43@5539.37,3263.78 5743.78,3263.78 5790,3310 5790,3435 5920,3565 6215.47,3565 6239.84,3589.37 U20.5@6239.84,3651.31
CSI1-HSYNCH: M1.B45 U20.39 | length 917.3
  Top Layer w4.7: M1.B45@5539.37,3283.46 5540.91,3285 5730,3285 5770,3325 5770,3585 5855,3670 6000.71,3670 6031.23,3700.52 U20.39@6131.57,3700.52
CSI1-PIXCLK: M1.B51 U20.11 | length 1096.4
  Top Layer w4.7: M1.B51@5539.37,3342.52 5622.48,3342.52 v1@5625.82,3339.18 ; v1(5895,3340) 5895,3391.57 5967.99,3464.57 6315,3464.57 6367.8,3517.36 U20.11@6367.8,3680.83
  Bottom Layer w4.7: v1(5626.71,3339.18) 5627.53,3340 v1(5895,3340)
CSI1-RST-B: M1.B29 U20.31 | length 1691.4
  Top Layer w4.7: M1.B29@5539.37,3125.98 5840.14,3125.98 5920,3205.85 5920,3285 5945,3310 5945,3365 v1(5970,3390) ; v1(5710,3390) 5710,3591 5825,3706 5825,3825 5870,3870 6085,3870 6097,3858 U20.31@6131.57,3858
  Bottom Layer w4.7: v1(5710,3390) v1(5970,3390)
CSI1-VSYNCH: M1.B49 U20.37 | length 908.5
  Top Layer w4.7: M1.B49@5539.37,3322.83 5707.83,3322.83 5730,3345 5730,3590 5879.89,3739.89 U20.37@6131.57,3739.89
DVDD-1V8-VIDEO1: C78.1 C79.1 C99.2 C100.2 L11.2 U19.14 U19.36 | length 539.6
  Top Layer w10: v1(6101.97,3064.96) U19.36@6131.45,3064.96 ; U19.14@6367.67,3045.28 6393.03,3045.28 v1(6395,3047.24)
  Bottom Layer w10: v1@6100,3062.99 v1(6101.97,3064.96) v1@6106.8,3060.13
  Bottom Layer w15: L11.2@6061.86,3139.26 6062.74,3138.38 C79.1@6062.74,3062.99 ; C99.2@6062.74,3000 C79.1@6062.74,3062.99 ; v1@6100,3062.99 C79.1@6062.74,3062.99 ; v1@6106.8,3060.13 C78.1@6130,3060.13 6159.87,3060.13 6175.13,3044.87 C100.2@6365,3044.87 6367.37,3047.24 v1(6395,3047.24)
DVDD-1V8-VIDEO2: C108.1 C109.1 C129.2 C130.2 L15.2 U20.14 U20.36 | length 531.5
  Top Layer w10: v1(6102.36,3760) 6102.79,3759.57 U20.36@6131.57,3759.57 ; U20.14@6367.8,3739.89 v1(6393.39,3739.89)
  Bottom Layer w10: C130.2@6361.97,3739.89 v1(6393.39,3739.89)
  Bottom Layer w15: C109.1@6062.68,3757.61 6063.4,3758.33 C108.1@6129.69,3758.33 6156.67,3758.33 6175.13,3739.87 C130.2@6361.95,3739.87
  Bottom Layer w20: L15.2@6062.68,3832.41 6062.68,3757.61 6062.68,3694.8 C129.2@6062.87,3694.61
DVDDL-RGMII: C38.1 C39.1 L7.2 L8.1 R34.2 U12.47 | length 649.5
  Top Layer w4.7: v1(4015,1410) 4081.5,1410 L8.1@4115,1376.5
  Top Layer w15: v1(4105,1265) 4165,1265 4175,1275 4175,1320 ; L8.1@4115,1376.5 4163.5,1376.5 4175,1365 4175,1320 ; C38.1@4244.09,1397.64 C38.1@4248.03,1393.7 ; C39.1@4259.4,1456.69 4259.4,1405.07 C38.1@4248.03,1393.7 ; 4175,1320 4176.1,1318.9 4248.9,1318.9 4257.5,1327.5 4250,1335 4250,1391.73 C38.1@4248.03,1393.7
  Bottom Layer w4.7: v1(4015,1410) 4015.75,1409.25 R34.2@4015.75,1374.2
  Bottom Layer w10: v1(4105,1265) 4108.76,1261.24 U12.47@4108.76,1225.89
ENET-REF-CLK: M1.C28 R42.1 | length 2062.6
  Top Layer w4.7: v1(2885,2025) 3144.29,2025 M1.C28@3145.67,2023.62
  Bottom Layer w4.7: v1(2885,2025) 2885,1260 2975,1170 3470,1170 3560,1080 3560,1020 3625,955 R42.1@3759.87,955
ETH-SH-GND: C49.2 J3.SH1 J3.SH2 R41.1
ETH-VDDIO-REG: C33.1 C34.1 M1.C37 R46.2 R47.2 U12.29 | length 1598.7
  Top Layer w10: M1.C37@3279.53,2122.05 3370,2122.05
  Top Layer w20: 3370,2122.05 3383.95,2122.05 3420,2086 3420,1510 3730,1200 v1(3730,1135) 3730,1110 ; v1(3730,1089.87) 3730,1110 ; v1(3855,1070) C34.1@3855,1099.87 ; C33.1@3890,1109.87 C34.1@3845,1109.87 3775,1109.87 3774.87,1110 3730,1110
  Bottom Layer w4.7: v1(3730,1089.87) 3730.13,1090 R47.2@3760.13,1090 ; v1(3730,1135) R46.2@3760.13,1135
  Bottom Layer w10: v1(3855,1070) 3867.68,1082.68 U12.29@3918.3,1082.68
ETH-WOL-INT: M1.C32 R36.1 U12.40 | length 1360.8
  Top Layer w4.7: M1.C32@3145.67,2062.99 3207.99,2062.99 v1(3210,2065)
  Bottom Layer w4.7: v1(3210,2065) 3325,1950 3510,1950 3990,1470 3990,1349.33 3974.87,1334.2 R36.1@3968.5,1334.2 3968.5,1306.02 3998.52,1276.01 U12.40@3998.52,1225.89
ETH_AVDDL: C42.1 C43.1 C44.1 C45.1 L8.2 U12.8 U12.13 U12.19 U12.44 | length 1003
  Top Layer w15: v1(4030,940) 4030,970 4040,980 4065,980 ; C44.1@4055,1309.87 4080,1309.87 ; C42.1@4105,920.13 4130,920.13 ; L8.2@4115,1313.5 4111.37,1309.87 4080,1309.87 ; C43.1@4150,920.13 4130,920.13 ; v1(4215,1080) C45.1@4180.13,1080 4180.13,1104.87 4165,1120 4110,1120 4095,1135 4065,1135 ; 4065,980 4120,980 4130,970 v1(4130,950) 4130,920.13 ; 4065,980 4065,1135 ; 4065,1135 v1(4065,1265) 4080,1280 4080,1309.87
  Bottom Layer w10: v1(4030,940) U12.19@4030.02,986.71 ; U12.44@4061.51,1225.89 4061.51,1261.51 v1(4065,1265) ; U12.13@4124.5,986.71 4124.5,955.5 v1(4130,950) ; U12.8@4157.48,1082.68 4212.32,1082.68 v1(4215,1080)